# EAGLE board doorbell (EAGLE 6.1)
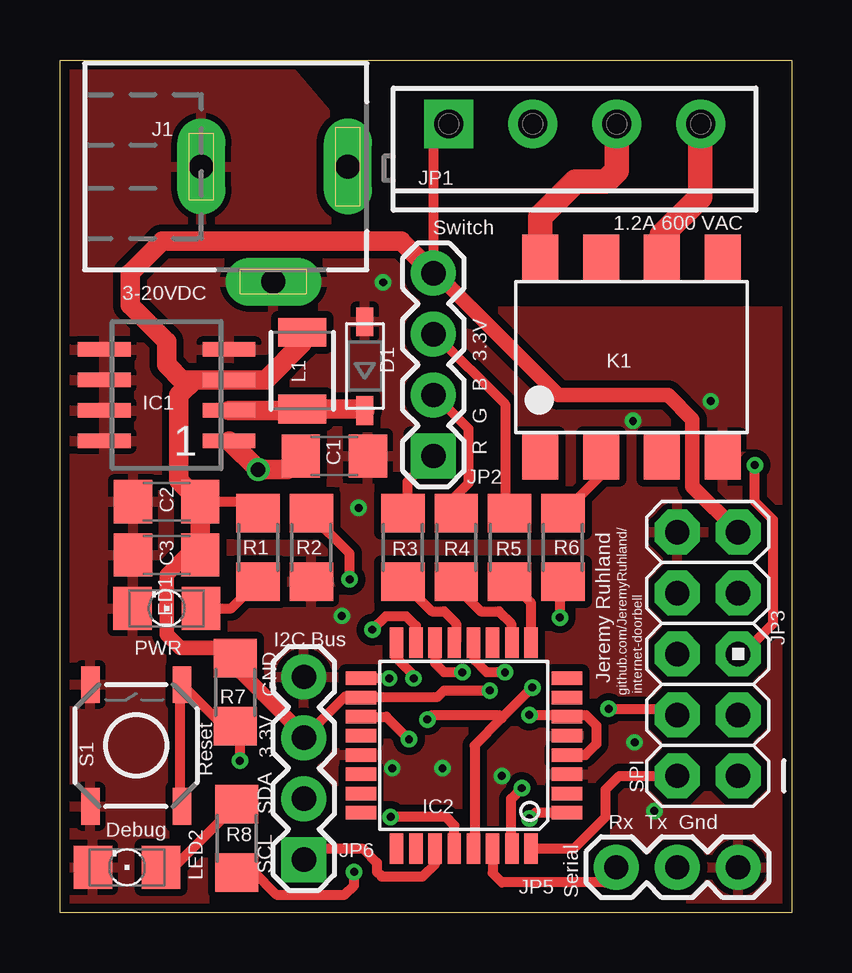
[diagram p0: board, top side]
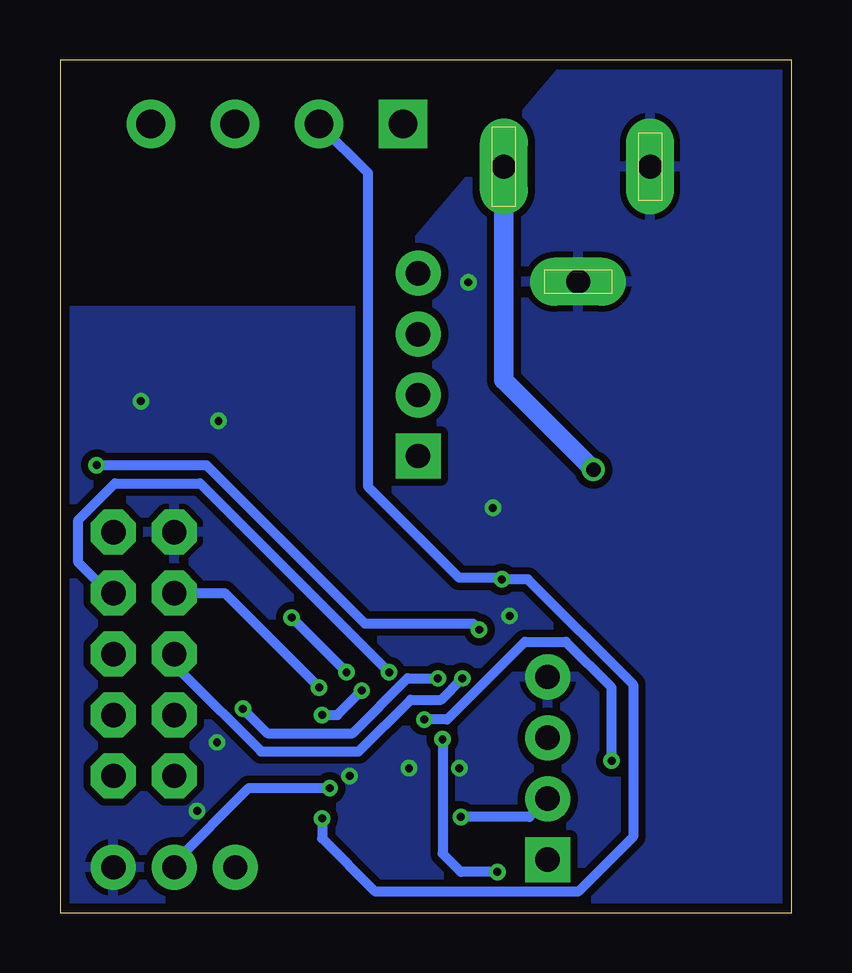
[diagram p1: board, bottom side, seen from below]

Size 30.48 x 35.56 mm. Coordinates in mm from the lower left corner, seen from the top.
Outline: 30.48,35.56 30.48,0 0,0 0,35.56 30.48,35.56
Copper layers (1*16): Top 0.0356mm / dielectric 1.5011mm / Bottom 0.0356mm
Design rules: minimum track width 6mil, minimum drill 13mil, track to track 6mil, track to pad 6mil, pad to pad 6mil, via to via 6mil, smd to smd 6mil, copper to edge 15mil, drill to drill 6mil, minimum pad ring 7mil, minimum via ring 7mil, stop-mask expansion 4mil, vias tented up to drill 0mil, thermal gap 10mil

## Footprints (pad centres in the part's own frame; a part is rotated, then mirrored left to right if it is on the bottom)
C1206 = smd 1.6 x 1.8: 1 -1.4,0; 2 1.4,0
SOD-123 = smd 1.2 x 0.7: A 1.85,0; C -1.85,0
SOP-8 = smd 2.2 x 0.6: 1 -2.6,1.905; 2 -2.6,0.635; 3 -2.6,-0.635; 4 -2.6,-1.905; 5 2.6,-1.905; 6 2.6,-0.635; 7 2.6,0.635; 8 2.6,1.905
TQFP32-08 = smd 1.27 x 0.559: 1 -4.293,2.8; 2 -4.293,2; 3 -4.293,1.2; 4 -4.293,0.4; 5 -4.293,-0.4; 6 -4.293,-1.2; 7 -4.293,-2; 8 -4.293,-2.8; 17 4.293,-2.8; 18 4.293,-2; 19 4.293,-1.2; 20 4.293,-0.4; 21 4.293,0.4; 22 4.293,1.2; 23 4.293,2; 24 4.293,2.8 | smd 0.559 x 1.27: 9 -2.8,-4.293; 10 -2,-4.293; 11 -1.2,-4.293; 12 -0.4,-4.293; 13 0.4,-4.293; 14 1.2,-4.293; 15 2,-4.293; 16 2.8,-4.293; 25 2.8,4.293; 26 2,4.293; 27 1.2,4.293; 28 0.4,4.293; 29 -0.4,4.293; 30 -1.2,4.293; 31 -2,4.293; 32 -2.8,4.293
DCJ0202_SILK = drill 1 pad 2 long: 1 0,8.18; 2 4.8,5.08; 3 0,2.08
SCREWTERMINAL-3.5MM-4_SILK = drill 1.2 pad 2.032 square: 1 0,0 | drill 1.2 pad 2.032: 2 3.5,0; 3 7,0; 4 10.5,0
1X04 = drill 1.016 pad 1.88 square: 1 0,0 | drill 1.016 pad 1.88: 2 2.54,0; 3 5.08,0; 4 7.62,0
AVR_ICSP = drill 1.016 pad 1.88 octagon: 1 -1.27,5.08; 2 1.27,5.08; 3 -1.27,2.54; 4 1.27,2.54; 5 -1.27,0; 6 1.27,0; 7 -1.27,-2.54; 8 1.27,-2.54; 9 -1.27,-5.08; 10 1.27,-5.08
1X03 = drill 1.016 pad 1.88: 1 0,0; 2 2.54,0; 3 5.08,0
DIL08SMD = smd 1.5 x 1.9: 1 -3.81,-4.15; 2 -1.27,-4.15; 3 1.27,-4.15; 4 3.81,-4.15; 5 3.81,4.15; 6 1.27,4.15; 7 -1.27,4.15; 8 -3.81,4.15
1210 = smd 1.2 x 2: 1 -1.6,0; 2 1.6,0
1206 = smd 1.6 x 1.803: A -1.422,0; C 1.422,0
R1206 = smd 1.6 x 1.803: 1 -1.422,0; 2 1.422,0
TACTILE_SWITCH_SMD = smd 1.524 x 0.762: 1 -2.54,1.905; 2 2.54,1.905; 3 -2.54,-1.905; 4 2.54,-1.905

## Placement (x,y rotation side)
C1  10uf  [C1206]  11.43,19.05 0 top
C2  10uf  [C1206]  4.45,17.14 180 top
C3  0.1uf  [C1206]  4.45,14.92 180 top
D1  [SOD-123]  12.7,22.8 90 top
IC1  AP1509  [SOP-8]  4.45,21.59 180 top
IC2  MEGA8-AI  [TQFP32-08]  16.83,6.99 180 top
J1  DCJ0202SILK  [DCJ0202_SILK]  3.81,31.11 270 top
JP1  [SCREWTERMINAL-3.5MM-4_SILK]  16.19,32.89 0 top
JP2  LED_header  [1X04]  15.56,19.05 90 top
JP3  M05X2PTH  [AVR_ICSP]  26.99,10.79 180 top
JP5  [1X03]  23.18,1.91 0 top
JP6  [1X04]  10.16,2.22 90 top
K1  AQH213B  [DIL08SMD]  23.81,23.18 0 top
L1  47uh  [1210]  10.1,22.61 90 top
LED1  [1206]  4.45,12.7 180 top
LED2  [1206]  2.79,1.91 180 top
R1  160  [R1206]  8.25,15.24 90 top
R2  10k  [R1206]  10.48,15.24 90 top
R3  160  [R1206]  14.29,15.24 90 top
R4  160  [R1206]  16.51,15.24 90 top
R5  160  [R1206]  18.73,15.24 90 top
R6  160  [R1206]  20.96,15.24 270 top
R7  10k  [R1206]  7.3,9.21 90 top
R8  160  [R1206]  7.37,3.11 270 top
S1  [TACTILE_SWITCH_SMD]  3.17,6.99 90 top

## Library data of the parts
C1-C3 D1 R1-R8 = adafruit
IC1 = diodes-inc
IC2 = atmel; MPN: ATMEGA8-16AU; OC_FARNELL: 9171371; OC_NEWARK: 73M8863
J1 = con-jack
JP1-JP3 JP5 JP6 L1 S1 = sparkfun
K1 = relay
LED1 LED2 = led

## Nets
3.3V: C2.1 C3.1 IC1.3 IC2.4 IC2.6 IC2.18 JP1.1 JP2.4 JP3.9 JP6.3 L1.2 R1.2 R7.2
B: IC2.13 R3.1
BELL: IC2.12 R6.2
BELL+: JP1.3 K1.8
BELL-: JP1.4 K1.6
CS: IC2.14 JP3.7
DBG: IC2.19 R8.2
G: IC2.10 R4.1
GND: C1.2 C2.2 C3.2 D1.A IC1.4 IC1.5 IC1.6 IC1.7 IC1.8 IC2.3 IC2.5 IC2.21 J1.2 J1.3 JP3.10 JP5.3 JP6.4 K1.4 LED1.C LED2.C R2.1 S1.1 S1.2
INT0: IC2.32 JP3.2
MISO: IC2.16 JP3.4
MOSI: IC2.15 JP3.5
N$1: K1.2 R6.1
N$2: C1.1 IC1.1 J1.1
N$3: D1.C IC1.2 L1.1
N$7: IC2.27 JP6.1
N$8: IC2.28 JP6.2
N$10: LED1.A R1.1
N$12: LED2.A R8.1
N$14: JP2.3 R5.2
N$15: JP2.2 R4.2
N$16: JP2.1 R3.2
R: IC2.9 R5.1
RST: IC2.29 JP3.8 R7.1 S1.3 S1.4
RX: IC2.30 JP5.1
SCK: IC2.17 JP3.6
SIG: IC2.1 JP1.2 R2.2
TX: IC2.31 JP5.2

## Tracks (layer width: path | path; a pad name or v marks a point on that pad's centre or on a via)
3.3V  (via drill 0.33)
  Top 0.406: v19.56,8.26 21.08,8.26 IC2.6 21.34,8.26 21.91,8.26 22.35,7.81 22.35,7.05 21.89,6.58 IC2.4 | v17.91,9.27 16,9.27 15.75,9.02 12.7,9.02 IC2.18 12.45,9.02 11.88,9.02 JP6.3 | C2.1 7.77,17.14 R1.2 | 7.11,10.54 R7.2 | JP2.4 15.56,31.75 15.56,32.07 15.56,32.26 JP1.1
  Top 0.61: JP2.4 15.68,26.67 20.77,21.59 25.34,21.59 26.35,20.57 26.35,17.78 JP3.9 | C3.1 5.27,14.92 4.45,14.1 4.45,11.62 5.02,11.05 6.88,11.05 R7.2 7.3,10.29 10.16,7.43 JP6.3
  Top 0.813: IC1.3 5.08,22.23 4.45,22.86 4.45,23.81 2.92,25.34 2.92,26.67 4.25,28 14.22,28 JP2.4 | IC1.3 5.59,22.23 4.95,21.59 4.95,18.04 C2.1 C3.1 | IC1.3 8.57,22.23 10.1,23.75 L1.2
  Bottom 0.406: v19.56,8.26 18.92,8.26 v17.91,9.27
B
  Top 0.406: IC2.13 16.51,11.3 16.51,12.06 16,12.57 15.49,12.57 14.48,13.59 R3.1
BELL  (via drill 0.33)
  Top 0.406: v18.54,10.03 17.78,10.03 17.27,10.54 17.27,11.05 IC2.12 | v20.83,12.32 20.83,13.59 R6.2
  Bottom 0.406: v20.83,12.32 v18.54,10.03
BELL+
  Top 1.016: K1.8 20,29.02 21.46,30.48 22.73,30.48 23.19,30.94 JP1.3
BELL-
  Top 1.016: K1.6 25.08,28.26 26.67,29.84 26.67,32.68 JP1.4
CS  (via drill 0.33)
  Top 0.406: v16.76,10.03 16,10.03 15.63,10.41 IC2.14
  Bottom 0.406: v16.76,10.03 24.64,17.91 28.19,17.91 29.72,16.38 29.72,14.61 28.45,13.34 JP3.7
DBG  (via drill 0.33)
  Top 0.406: IC2.19 13.6,8.19 v14.54,7.24 | v12.26,1.71 12.26,1.14 11.88,0.76 9.02,0.76 8.09,1.69 R8.2
  Bottom 0.406: v12.26,1.71 13.78,1.71 14.54,2.48 v14.54,7.24
G
  Top 0.406: IC2.10 18.8,11.3 18.8,12.06 18.29,12.57 17.53,12.57 16.51,13.59 R4.1
GND  (via drill 0.33)
  other vias: 18.42,5.71 27.11,21.34 23.88,20.51 13.84,6.03 15.94,6.03 23.94,7.11 24.77,4.25 13.46,26.29 12.45,16.89 11.75,12.38
  pour Top (isolate 0.305): 30.48,0 0,0 0,35.56 9.21,35.56 18.1,25.08 30.48,25.08
  pour Bottom (isolate 0.305): 30.48,0 0,0 0,35.56 9.21,35.56 18.1,25.08 30.48,25.08
INT0
  Top 0.406: IC2.32 21.43,2.69 22.73,4 22.73,5.14 23.3,5.71 25.27,5.71 JP3.2 25.78,5.71
MISO  (via drill 0.33)
  Top 0.406: v22.86,8.51 25.46,8.51 JP3.4 | v14.73,9.78 14.73,9.91 13.97,10.67 14.03,10.73 IC2.16
  Bottom 0.406: v14.73,9.78 16,9.78 18.29,7.49 21.84,7.49 v22.86,8.51
MOSI  (via drill 0.33)
  Top 0.406: v28.96,18.67 28.96,17.14 29.72,16.38 29.72,12.06 28.45,10.79 JP3.5 | v13.02,11.81 13.59,12.38 14.41,12.38 14.83,11.97 IC2.15
  Bottom 0.406: v28.96,18.67 24.38,18.67 17.78,12.06 13.27,12.06 v13.02,11.81
N$1
  Top 0.406: K1.2 22.54,18.25 R6.1
N$2  (via drill 0.6)
  Top 0.406: 9.46,18.48 C1.1
  Top 0.813: 9.46,18.48 v8.25,18.48 IC1.1
  Bottom 0.813: v8.25,18.48 11.99,22.21 J1.1
N$3
  Top 0.813: IC1.2 10.04,20.95 L1.1 12.64,21.01 D1.C
N$7
  Top 0.406: JP6.1 10.16,2.29 10.54,2.67 12.64,2.67 13.21,2.1 13.21,1.71 13.4,1.52 15.11,1.52 15.63,2.04 IC2.27
N$8  (via drill 0.33)
  Top 0.406: IC2.28 16.43,3.64 16.07,4 v13.78,4
  Bottom 0.406: JP6.2 10.92,4 v13.78,4
N$10
  Top 0.406: LED1.A 7.14,12.7 R1.1
N$12
  Top 0.406: LED2.A 4.74,1.91 R8.1
N$14
  Top 0.406: R5.2 18.54,16.89 18.54,21.21 15.62,24.13 JP2.3
N$15
  Top 0.406: R4.2 16.51,17.4 17.02,17.91 17.02,20.19 15.62,21.59 JP2.2
N$16
  Top 0.406: R3.2 14.48,16.89 14.48,17.97 JP2.1
R
  Top 0.406: IC2.9 19.63,12.92 R5.1
RST  (via drill 0.33)
  Top 0.406: v19.69,9.4 18.42,8.13 | IC2.29 17.27,2.92 17.27,6.99 18.42,8.13 | 18.42,8.13 18.29,8.26 15.49,8.26 v15.3,8.06 | v7.49,6.35 7.49,8 7.37,8 R7.1 6.82,7.79 S1.4 5.02,9.46 5.02,4.51 S1.3
  Bottom 0.406: v15.3,8.06 14.35,8.06 11.11,11.3 9.4,11.3 7.49,9.4 v7.49,6.35 | v19.69,9.4 23.62,13.34 JP3.8
RX
  Top 0.406: JP5.1 23.18,1.71 22.73,1.27 18.42,1.27 18.03,1.66 IC2.30
SCK  (via drill 0.33)
  Top 0.406: v13.72,9.78 12.7,9.78 IC2.17
  Bottom 0.406: v13.72,9.78 14.6,8.89 15.87,8.89 18.03,6.73 22.1,6.73 25.4,10.03 25.65,10.29 25.72,10.35 JP3.6
SIG  (via drill 0.33)
  Top 0.406: R2.2 10.41,16.64 12.06,14.99 v12.06,13.91 | IC2.1 19.81,4.18 v19.56,3.94
  Bottom 0.406: v19.56,3.94 19.56,3.11 17.34,0.89 8.89,0.89 6.6,3.17 6.6,9.53 10.99,13.91 v12.06,13.91 12.13,13.97 13.84,13.97 17.65,17.78 17.65,30.48 17.65,30.66 17.65,30.85 JP1.2
TX  (via drill 0.33)
  Top 0.406: IC2.31 18.8,2.92 18.8,4.76 v19.24,5.21
  Bottom 0.406: v19.24,5.21 22.61,5.21 25.72,2.1 JP5.2

## Text on the board
_tsilk: Switch | 1.2A 600 VAC | 3-20VDC | R G B 3.3V | PWR | I2C Bus | Jeremy Ruhland | GND | github.com/JeremyRuhland/ | internet-doorbell | Reset | 3.3V | SPI | SDA | Debug | Rx Tx Gnd | SCL | Serial